# Altium PCB Curtch_PCB.PcbDoc
Units mm, origin at the board's own origin, x right, y up, seen from the top; angles counter-clockwise.
Board outline 209.04 x 38.23 mm, 2 copper layers (Top Layer, Bottom Layer); 22 components, 28 nets, 114 pads, 13 vias.
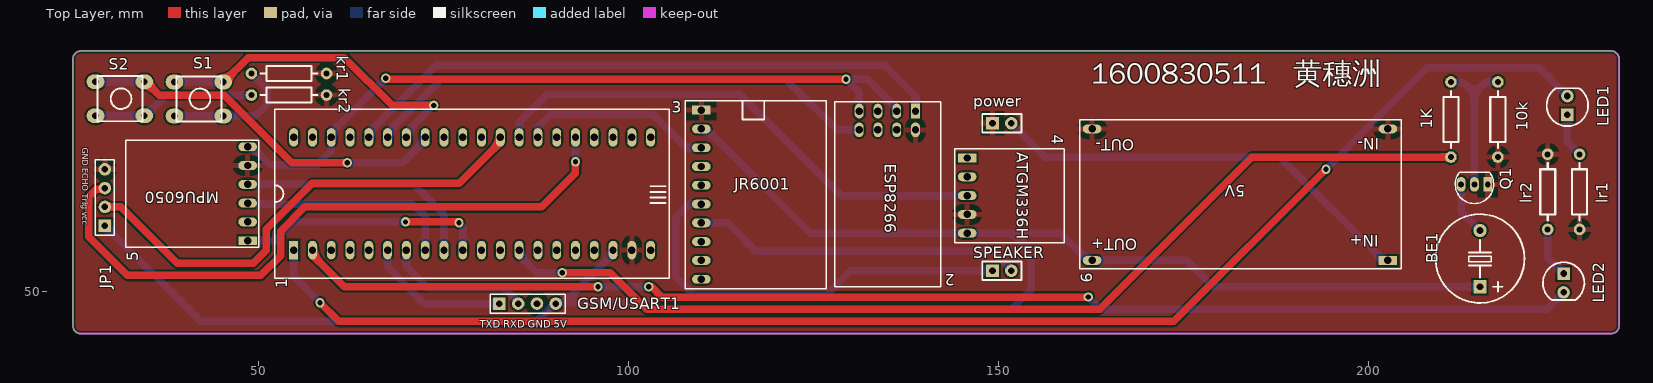
[diagram p0: Top Layer view]
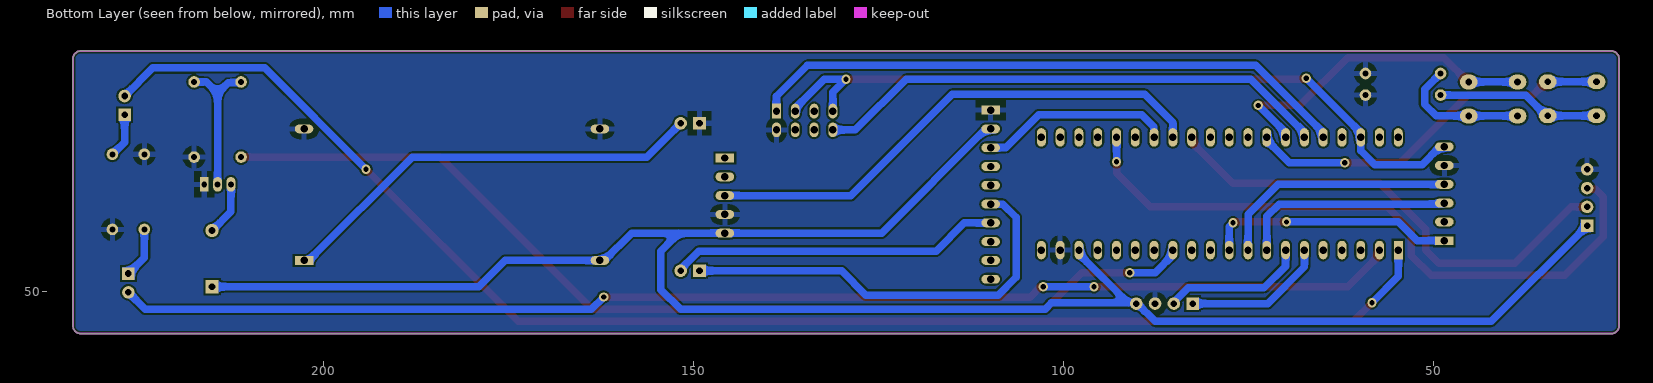
[diagram p1: Bottom Layer view, seen from below]

## Layer stack, top to bottom
Top Solder: solder mask 0.0102, Solder Resist, Dk 3.5
Top Layer: signal copper 0.0356
Dielectric 1: dielectric 0.32, FR-4, Dk 4.8
Bottom Layer: signal copper 0.0356
Bottom Solder: solder mask 0.0102, Solder Resist, Dk 3.5

## Board outline
24.892,45.339 24.892,81.534 24.892,81.407 cw(c25.971,81.471) 25.908,82.55 232.791,82.55 cw(c232.854,81.471) 233.934,81.534 233.934,45.466 cw(c232.855,45.402) 232.918,44.323 26.035,44.323 cw(c25.971,45.402)

## Design rules (kind name [scope] priority, off if disabled: settings)
Clearance [All] p1: gap=0.254 ignorepadtopadclearanceinfootprint=FALSE except(0: Arc-Hole Track-Hole SMDPad-Hole THPad-Hole Via-Hole Fill-Hole Poly-Hole Region-Hole Text-Hole)
PlaneClearance [InNet('GND')] p1: clearance=0.508
PlaneConnect PlaneConnect_1 [All] p1: planeconnectstyle=Relief reliefexpansion=0.508 reliefentries=4 reliefconductorwidth=0.254 reliefairgap=0.254
PolygonConnect [InNet('GND') vs InNet('GND')] p1: connectstyle=Relief reliefconductorwidth=0.762 reliefentries=4 polygonreliefangle="90 Angle" airgapwidth=0.762
RoutingVias [All] p1: holewidth=0.711 width=1.27 viastyle="Through Hole" minholewidth=0.711 minwidth=1.27 maxholewidth=0.711 maxwidth=1.27
SolderMaskExpansion [All] p1: expansion=0.102 istentingtop=FALSE
Width [All] p1: maxlimit=1.016 minlimit=0.762 preferedwidth=1.016
28 further rules are at their usual default settings.

## Components (designator, comment, footprint, x,y, rotation, side; value= is the part's Value field where it differs from the comment)
1 "STM32最小系统板" DIP40 54.737,55.626 r90 top
1K "RES" AXIAL0.4 211.201,68.199 r90 top
2 "ESP8266" "DIP8 - duplicate" 138.811,74.422 r270 top
3 "JR6001" DIP20 109.855,74.549 r0 top
4 "ATGM336H" DIP10 145.796,68.072 r0 top
5 "MPU6050" MPU6050 48.514,56.896 r180 top
6 "5V稳压" DIP16 202.687,54.229 r180 top
10k "RES" AXIAL0.4 217.551,78.359 r270 top
BE1 "BEEP" "BEEP 7.6x12x7.5" 215.138,54.483 r0 top
GSM/USART1 "HDR-1X4" HDR2.54-Y-LI-4P 86.36,48.387 r0 top (schematic designator USART1)
JP1 "HDR-1X4" HDR2.54-LI-4P 29.21,62.738 r90 top
kr1 "RES" AXIAL0.4 49.022,79.502 r0 top
kr2 "RES" AXIAL0.4 49.022,76.581 r0 top
LED1 "红色" "LED 5MM-B" 226.949,75.184 r90 top
LED2 "红色" "LED 5MM-B" 226.441,51.181 r270 top
lr1 "RES" AXIAL0.4 228.6,68.58 r270 top
lr2 "RES" AXIAL0.4 224.282,58.42 r90 top
power "HDR-1X2" HDR2.54-Y-LI-2P 150.495,72.771 r0 top
Q1 "S9014" TO92A 214.376,64.516 r90 top
S1 "SW-PB" SW6*6 38.612,78.359 r0 top
S2 "SW-PB" SW6*6 27.94,78.387 r0 top
SPEAKER "HDR-1X2" HDR2.54-Y-LI-2P 150.495,52.832 r0 top

## Footprints (in the part's own frame and the unit in brackets; to place one, negate y for a bottom-side part, rotate by r counter-clockwise, add the part's x,y. Pads: shape width x height; smd on the part's side, far side on the other; paste and mask are expansions set on the pad)
AXIAL0.4 [mil] "此模型引用\"王千会\"作品，特此声明"
  round 62 hole 32: 1(0,0) 2(400,0)
  silkscreen extent 48,-40 352,40, body extent -13,-47 413,47, height 295
"BEEP 7.6x12x7.5" [mm] "6.5*12*7.5mm(脚距,直径,高度)"
  rect 1.8x1.8 hole 0.9: 1(-0.011,-3.811)
  round 1.8 hole 0.9: 2(-0.011,3.789)
  silkscreen extent -6.01,-6 5.99,6, body extent -6.01,-5.93 5.99,6.07, height 7.55
"DIP8 - duplicate" [mm]
  rect 2x1.2 hole 1: 1(0,0)
  oval 2x1.2 hole 1: 2(0,-2.54) 3(0,-5.08) 4(0,-7.62) 5(2.54,-7.62) 6(2.54,-5.08) 7(2.54,-2.54) 8(2.54,0)
  silkscreen extent -1.27,-10.92 23.75,3.43
DIP10 [mm]
  rect 2.54x1.2 / inner rect 2.5x1.2 / far side rect 2.54x1.2 hole 1: 1(0,0)
  oval 2.54x1.2 / inner oval 2.5x1.2 / far side oval 2.54x1.2 hole 1: 2(0,-2.54) 3(0,-5.08) 4(0,-7.62) 5(0,-10.16)
  silkscreen extent -1.65,-11.43 13.1,1.27
DIP16 [mm]
  rect 2.5x1.2 hole 1: 1(0,0)
  oval 2.5x1.2 hole 1: 2(0,-17.78) 3(40,-17.78) 4(40,0)
  silkscreen extent -1.78,-19.05 41.66,1.14
DIP20 [mm]
  rect 2.5x1.2 hole 1: 1(0,0)
  oval 2.5x1.2 hole 1: 2(0,-2.54) 3(0,-5.08) 4(0,-7.62) 5(0,-10.16) 6(0,-12.7) 7(0,-15.24) 8(0,-17.78) 9(0,-20.32) 10(0,-22.86)
  silkscreen extent -2.16,-24.13 16.89,1.27
DIP40 [mm]
  rect 2.5x1.2 hole 1: 1(0,0)
  oval 2.5x1.2 hole 1: 2(0,-2.54) 3(0,-5.08) 4(0,-7.62) 5(0,-10.16) 6(0,-12.7) 7(0,-15.24) 8(0,-17.78) 9(0,-20.32) 10(0,-22.86) 11(0,-25.4) 12(0,-27.94) 13(0,-30.48) 14(0,-33.02) 15(0,-35.56) 16(0,-38.1) 17(0,-40.64) 18(0,-43.18) 19(0,-45.72) 20(0,-48.26) 21(15.24,-48.26) 22(15.24,-45.72) 23(15.24,-43.18) 24(15.24,-40.64) 25(15.24,-38.1) 26(15.24,-35.56) 27(15.24,-33.02) 28(15.24,-30.48) 29(15.24,-27.94) 30(15.24,-25.4) 31(15.24,-22.86) 32(15.24,-20.32) 33(15.24,-17.78) 34(15.24,-15.24) 35(15.24,-12.7) 36(15.24,-10.16) 37(15.24,-7.62) 38(15.24,-5.08) 39(15.24,-2.54) 40(15.24,0)
  silkscreen extent -3.81,-50.8 19.05,2.54
HDR2.54-LI-4P [mm] "排针，4脚"
  rect 1.7x1.7 hole 0.9: 1(-3.81,0)
  round 1.7 hole 0.9: 2(-1.27,0) 3(1.27,0) 4(3.81,0)
  silkscreen extent -5.08,-1.27 5.08,1.27, body extent -5.08,-1.27 5.08,1.27, height 8.5
HDR2.54-Y-LI-2P [mm] "圆孔排母，2脚"
  rect 1.7x1.7 hole 0.9: 1(-1.27,0)
  round 1.7 hole 0.9: 2(1.27,0)
  silkscreen extent -2.67,-1.27 2.67,1.27, body extent -2.54,-1.27 2.54,1.27, height 4.31
HDR2.54-Y-LI-4P [mm] "圆孔排母，4脚"
  rect 1.7x1.7 hole 0.9: 1(-3.81,0)
  round 1.7 hole 0.9: 2(-1.27,0) 3(1.27,0) 4(3.81,0)
  silkscreen extent -5.08,-1.27 5.08,1.27, body extent -5.08,-1.27 5.08,1.27, height 4.31
"LED 5MM-B" [mm] "蓝色5mm直插LED"
  rect 1.7x1.7 hole 0.9: 1(-1.27,0)
  round 1.7 hole 0.9: 2(1.27,0)
  silkscreen extent -2.8,-2.8 2.33,2.8, body extent -2.85,-2.85 2.45,2.85, height 8.75
MPU6050 [mm]
  rect 2.5x1.2 hole 1: 1(0,0)
  oval 2.5x1.2 hole 1: 2(0,-2.54) 3(0,-5.08) 4(0,-7.62) 5(0,-10.16) 6(0,-12.7)
  silkscreen extent -1.52,-13.59 16.51,0.89
SW6*6 [mm]
  oval 2.4x2 hole 0.9: 1(0,0) 1(6.6,0) 2(0,-4.6) 2(6.6,-4.6)
  silkscreen extent 0.28,-5.34 6.38,0.76
TO92A [mm] "92晶体管"
  rect 2x1.2 hole 0.8: 1(0,-1.8)
  oval 2x1.2 hole 0.8: 2(0,0) 3(0,1.8)
  silkscreen extent -2.6,-2.6 1.6,2.6, body extent -2.3,-2.3 1.3,2.3, height 7.6

## Part data
2: library part Component_1
GSM/USART1 JP1: library part "Header 4", "4P接插件", BOM名称=4P接插件, 版权归属=源创客, 学习资源=www.ooocke.com
LED1 LED2: library part LED-5MM, "5mm插件LED", BOM名称=5mm插件LED, 版权归属=源创客, 学习资源=www.ooocke.com
power SPEAKER: library part "Header 2", "2P接插件", BOM名称=2P接插件, 版权归属=源创客, 学习资源=www.ooocke.com
Q1: library part 9014-DIP, "低噪放大-NPN型", BOM名称=低噪放大-NPN型, 版权归属=源创客, 属性="50V 0.1A 0.4W 150MHZ", 学习资源=www.ooocke.com

## Via types
v1: diameter 1.27, hole 0.711, Top Layer to Bottom Layer, 13 vias

## Nets (pads, with @x,y where several pads share a name; then routed paths per layer and width w, separated by ;. In a path a pad name is that pad's centre, name@x,y a point inside that pad or via, vN(x,y) a via of type N, cw(c..) or ccw(c..) an arc to the next point about the centre after c; other vN are vias at no path point)
3.3V: 1.38 2.2 2.4 5.6 | length 102
  Top Layer w1.016: v1(67.183,78.867) 67.252,78.867 67.379,78.74 v1(129.413,78.74)
  Bottom Layer w1.016: 5.6 49.114,69.596 49.256,69.454 49.256,69.449 51.522,67.183 57.912,67.183 59.817,69.088 1.38 59.817,71.501 v1@67.056,78.74 ; 2.4 131.191,76.962 v1(129.413,78.74) 132.353,78.74 136.271,74.822 2.2
5V: 1.18 3.2 4.5 6.4 BE1.1 GSM/USART1.4 JP1.1 | length 265.9
  Top Layer w1.016: 3.2 3.2@109.982,71.882
  Bottom Layer w1.016: JP1.1 42.164,45.974 87.624,45.974 GSM/USART1.4@90.037,48.387 ; GSM/USART1.4 90.266,48.483 91.282,48.483 ; 1.18 97.917,55.026 97.832,54.941 97.74,54.941 91.282,48.483 ; 3.2 110.505,72.009 124.602,57.912 4.5 152.019,57.912 ; BE1.1@215.192,50.672 179.071,50.672 175.514,54.229 6.4 162.087,54.229 158.404,57.912 152.019,57.912 ; 91.282,48.483 101.631,48.483 102.489,47.625 151.765,47.625 154.432,50.292 154.432,55.499 152.019,57.912
8V: 6.1 power.2 | length 58.6
  Bottom Layer w1.016: power.2 156.337,68.199 188.067,68.199 202.037,54.229 6.1
B12: 1.1 LED1.2 | length 194.1
  Top Layer w1.016: v1(58.293,48.514) 60.833,45.974 173.736,45.974 v1(194.31,66.548)
  Bottom Layer w1.016: 1.1 54.737,52.07 v1(58.293,48.514) ; v1(194.31,66.548) 208.026,80.264 223.139,80.264 LED1.2
B13: 1.2 LED2.2 | length 173.8
  Top Layer w1.016: 1.2 57.277,54.976 61.58,50.673 v1(95.885,50.673) ; v1(102.743,50.673) 103.124,50.673 104.521,49.276 v1(162.179,49.276)
  Bottom Layer w1.016: v1(95.885,50.673) v1(102.743,50.673) ; v1(162.179,49.276) 163.83,47.625 224.155,47.625 LED2.2
GND: 1.19 2.8 3.1 4.4 5.5 6.2 6.3 10k.2 GSM/USART1.3 JP1.4 kr1.2 kr2.2 lr1.2 lr2.2 power.1 Q1.1
Net1K_2: 1K.2 10k.1 Q1.2 | length 19.9
  Bottom Layer w1.016: 1K.2 211.308,78.252 212.959,78.252 214.376,76.835 ; Q1.2 214.376,76.835 ; 10k.1 215.9,78.359 214.376,76.835
NetBE1_2: BE1.2 Q1.3 | length 7.3
  Bottom Layer w1.016: Q1.3 212.576,60.823 BE1.2
Netkr1_1: kr1.1 S1.2 | length 18.3
  Bottom Layer w1.016: S1.2@38.612,73.759 45.212,73.759 49.629,73.759 51.181,75.311 51.181,77.343 kr1.1
Netkr2_1: kr2.1 S2.2 | length 22.2
  Bottom Layer w1.016: S2.2@27.94,73.787 34.54,73.787 34.74,73.787 37.534,76.581 kr2.1
NetLED1_1: LED1.1 lr1.1 | length 6
  Bottom Layer w1.016: LED1.1 226.949,70.231 lr1.1
NetLED2_1: LED2.1 lr2.1 | length 6.9
  Bottom Layer w1.016: lr2.1 224.282,54.61 LED2.1
PA0: 1.25 JP1.3 | length 88.5
  Top Layer w1.016: JP1.3 29.079,63.877 28.063,63.877 27.051,62.865 27.051,57.404 32.258,52.197 50.292,52.197 52.959,54.864 52.959,58.166 56.261,61.468 88.265,61.468 92.837,66.04 v1(92.837,67.564)
  Bottom Layer w1.016: v1(92.837,67.564) 1.25
PA2: 1.27 3.3 | length 26
  Bottom Layer w1.016: 1.27 87.792,70.901 87.792,72.298 89.408,73.914 103.378,73.914 107.823,69.469 3.3
PA3: 1.28 4.3 | length 69.9
  Bottom Layer w1.016: 1.28 85.217,72.898 89.027,76.708 115.062,76.708 128.778,62.992 4.3
PA4: 1.29 JP1.2 | length 65.7
  Top Layer w1.016: JP1.2 31.369,61.468 38.989,53.848 49.276,53.848 51.054,55.626 51.054,58.42 57.277,64.643 77.104,64.643 82.677,70.216 1.29
PA9: 1.6 GSM/USART1.1 | length 20.1
  Top Layer w1.016: 1.6@67.437,54.976 1.6
  Bottom Layer w1.016: 1.6 67.437,53.34 72.39,48.387 GSM/USART1.1
PA10: 1.7 GSM/USART1.2 | length 20.2
  Top Layer w1.016: 1.7@69.977,54.976 1.7
  Bottom Layer w1.016: 1.7 69.977,53.467 72.898,50.546 83.169,50.546 84.241,49.474 84.241,49.421 85.09,48.572 GSM/USART1.2
PA11: 1.8 5.3 | length 29.3
  Bottom Layer w1.016: 5.3 48.641,61.976 48.768,61.849 70.866,61.849 72.517,60.198 1.8
PA12: 1.9 5.4 | length 33.1
  Bottom Layer w1.016: 5.4 70.993,64.516 75.057,60.452 1.9
PA15: 1.10 5.1 | length 34.2
  Top Layer w1.016: v1(69.85,59.436) 76.893,59.436 77.02,59.309 v1(77.089,59.309)
  Bottom Layer w1.016: 5.1 52.187,56.896 54.727,59.436 v1(69.85,59.436) ; v1(77.089,59.309) 77.597,58.801 1.10 1.10@77.597,54.976
PB0: 1.33 S2.1 | length 50.9
  Top Layer w1.016: S2.1@34.54,78.387 34.74,78.387 36.546,76.581 45.339,76.581 54.483,67.437 v1(61.976,67.437)
  Bottom Layer w1.016: S2.1@27.94,78.387 S2.1@34.54,78.387 ; v1(61.976,67.437) 69.469,67.437 72.644,70.612 72.517,70.739 1.33
PB1: 1.34 S1.1 | length 44.9
  Top Layer w1.016: S1.1@45.212,78.359 45.307,78.359 48.609,81.661 61.595,81.661 68.072,75.184 v1(73.66,75.184)
  Bottom Layer w1.016: S1.1@38.612,78.359 S1.1@45.212,78.359 ; 1.34 69.977,71.501 v1(73.66,75.184)
PB5: 1.13 1K.1 | length 138.2
  Top Layer w1.016: v1(91.059,52.578) 97.536,52.578 102.489,47.625 163.703,47.625 184.277,68.199 1K.1
  Bottom Layer w1.016: 1.13 85.217,54.976 87.615,52.578 v1(91.059,52.578)
PB10: 1.36 2.1 | length 82.1
  Bottom Layer w1.016: 1.36 64.897,71.516 74.026,80.645 134.62,80.645 138.811,76.454 2.1
PB11: 1.35 2.5 | length 70.2
  Bottom Layer w1.016: 1.35 67.437,71.516 74.661,78.74 121.285,78.74 128.143,71.882 2.5
SPK+: 3.6 SPEAKER.1 | length 57.5
  Bottom Layer w1.016: 3.6 108.204,61.849 106.426,60.071 106.426,51.943 108.839,49.53 126.712,49.53 130.014,52.832 SPEAKER.1
SPK-: 3.7 SPEAKER.2 | length 44.7
  Bottom Layer w1.016: 3.7 113.411,59.309 117.221,55.499 149.336,55.499 151.634,53.201 151.634,52.963 SPEAKER.2
pads on no net: 1.3 1.4 1.5 1.11 1.12 1.14 1.15 1.16 1.17 1.20 1.21 1.22 1.23 1.24 1.26 1.30 1.31 1.32 1.37 1.39 1.40 2.3 2.6 2.7 3.4 3.5 3.8 3.9 3.10 4.1 4.2 5.2

## Polygon pours and split planes (outlines as drawn)
GND on Bottom Layer "GND_L02_P000" (solid, pour order 0): 25.654,44.323 24.892,45.085 24.892,45.339 24.892,81.788 25.527,82.423 25.781,82.423 25.908,82.55 233.299,82.55 233.68,82.169 233.68,82.042 233.934,81.788 233.934,81.534 233.934,45.466 233.934,44.958 233.553,44.577 233.426,44.577 233.172,44.323
GND on Top Layer "GND_L01_P001" (solid, pour order 1): 25.527,44.323 24.892,44.958 24.892,81.788 25.654,82.55 233.172,82.55 233.934,81.788 233.934,81.534 233.934,45.085 233.172,44.323

## Keep-outs
Keep-Out Layer:
  lines w0.254: 24.892,81.407 cw(c25.971,81.471) 25.908,82.55 232.791,82.55 cw(c232.854,81.471) 233.934,81.534 233.934,45.466 cw(c232.855,45.402) 232.918,44.323 26.035,44.323 cw(c25.971,45.402) 24.892,45.339 24.892,81.534

## Silkscreen, mask and mechanical layers (free items; w line width, h text height)
Top Overlay:
  text "1600830511   黄穗洲" at 162.54,77.124 h5
  text "GND ECHO Trig vcc" at 26.149,69.463 h0.8 r270
  text "TXD RXD GND 5V" at 79.91,45.093 h1

## Text inside footprints (layer, text, board x,y; h text height)
6: Top Overlay "IN+" at 201.416,57.658 h1.52 r180; Top Overlay "IN-" at 201.543,70.739 h1.52 r180; Top Overlay "5V" at 183.383,64.389 h1.52 r180; Top Overlay "OUT+" at 168.777,57.15 h1.52 r180; Top Overlay "OUT-" at 168.396,70.612 h1.52 r180